# EAGLE board loraNode (EAGLE 9.5.2)
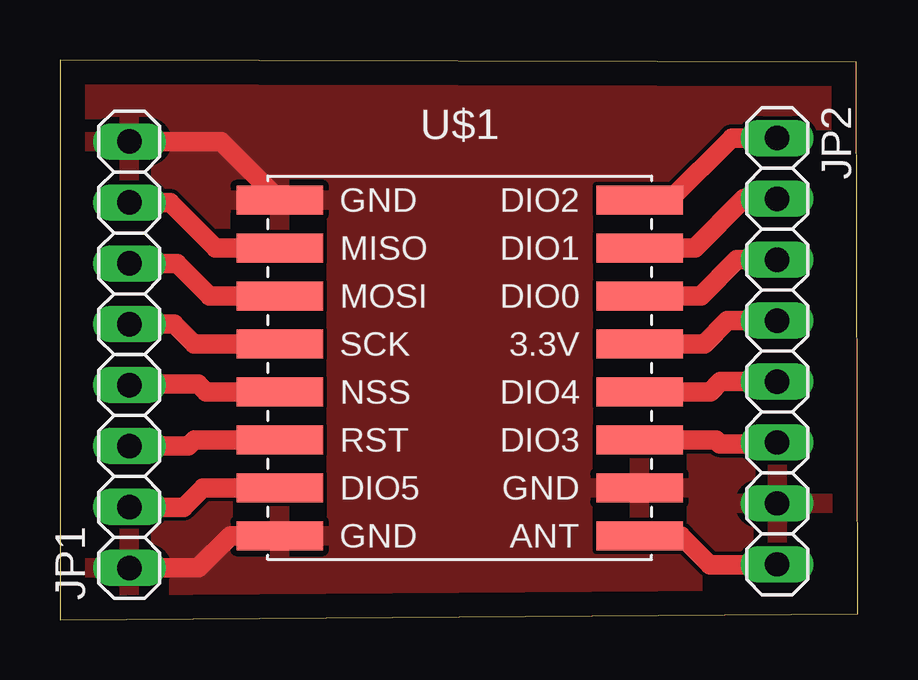
[diagram p0: board, top side]

Size 33.25 x 23.35 mm. Coordinates in mm from the lower left corner, seen from the top.
Outline: 0,0 33.25,0.25 33.2,23.25 0,23.35 0,0
Copper layers (1*16): Top 0.035mm / dielectric 1.5mm / Bottom 0.035mm
Design rules "default": minimum track width 6mil, minimum drill 0.35mm, track to track 6mil, track to pad 6mil, pad to pad 6mil, via to via 6mil, smd to smd 6mil, copper to edge 40mil, drill to drill 6mil, minimum pad ring 10mil, minimum via ring 8mil, stop-mask expansion 4mil, vias tented up to drill 0mil, thermal gap 10mil

## Footprints (pad centres in the part's own frame; a part is rotated, then mirrored left to right if it is on the bottom)
1X08 = drill 1.016 long: 1 -8.89,0; 2 -6.35,0; 3 -3.81,0; 4 -1.27,0; 5 1.27,0; 6 3.81,0; 7 6.35,0; 8 8.89,0
WIRELESS-LORA-RFM95W#SMD = smd 3.6 x 1.2: A1 -7.5,7; A2 -7.5,5; A3 -7.5,3; A4 -7.5,1; A5 -7.5,-1; A6 -7.5,-3; A7 -7.5,-5; A8 -7.5,-7; B1 7.5,7; B2 7.5,5; B3 7.5,3; B4 7.5,1; B5 7.5,-1; B6 7.5,-3; B7 7.5,-5; B8 7.5,-7

## Placement (x,y rotation side)
JP1  [1X08]  2.89,11.06 90 top
JP2  [1X08]  29.9,11.21 270 top
U$1  WIRELESS-LORA-RFM95W#SMD  [WIRELESS-LORA-RFM95W#SMD]  16.66,10.51 0 top

## Library data of the parts
JP1 JP2 = pinhead
U$1 = dht22

## Nets
ANT: JP2.8 U$1.B8
DIO5: JP1.2 U$1.A7
GND: JP1.1 JP1.8 JP2.7 U$1.A1 U$1.A8 U$1.B7
INT: JP2.3 U$1.B3
IO1: JP2.2 U$1.B2
IO2: JP2.1 U$1.B1
IO3: JP2.6 U$1.B6
IO4: JP2.5 U$1.B5
MISO: JP1.7 U$1.A2
MOSI: JP1.6 U$1.A3
NSS: JP1.4 U$1.A5
RST: JP1.3 U$1.A6
SCK: JP1.5 U$1.A4
VCC: JP2.4 U$1.B4

## Tracks (layer width: path | path; a pad name or v marks a point on that pad's centre or on a via)
ANT
  Top 0.813: U$1.B8 25.89,3.51 27.1,2.3 29.88,2.3 JP2.8
DIO5
  Top 0.813: U$1.A7 5.96,5.51 5.15,4.7 JP1.2
GND
  Top 0.813: U$1.A1 6.72,19.95 JP1.8 | U$1.A8 7.11,3.51 5.77,2.17 JP1.1
  pour Top: -0.1,0.05 -0.1,23.05 0.15,23.3 33.1,23.3 33.1,0.05
INT
  Top 0.813: U$1.B3 26.71,13.51 28.22,15.02 JP2.3
IO1
  Top 0.813: U$1.B2 26.46,15.51 28.51,17.56 JP2.2
IO2
  Top 0.813: U$1.B1 25.41,17.51 28,20.1 JP2.1
IO3
  Top 0.813: U$1.B6 27.34,7.51 27.5,7.35 29.85,7.35 JP2.6
IO4
  Top 0.813: U$1.B5 27.11,9.51 27.54,9.94 JP2.5
MISO
  Top 0.813: U$1.A2 6.49,15.51 4.59,17.41 JP1.7
MOSI
  Top 0.813: U$1.A3 6.24,13.51 4.88,14.87 JP1.6
NSS
  Top 0.813: U$1.A5 6.09,9.51 5.75,9.85 2.95,9.85 JP1.4
RST
  Top 0.813: U$1.A6 5.61,7.51 5.35,7.25 JP1.3
SCK
  Top 0.813: U$1.A4 5.59,11.51 4.77,12.33 JP1.5
VCC
  Top 0.813: U$1.B4 26.86,11.51 27.83,12.48 JP2.4